# EAGLE board AQ_sensor_GSM (EAGLE 9.6.2)
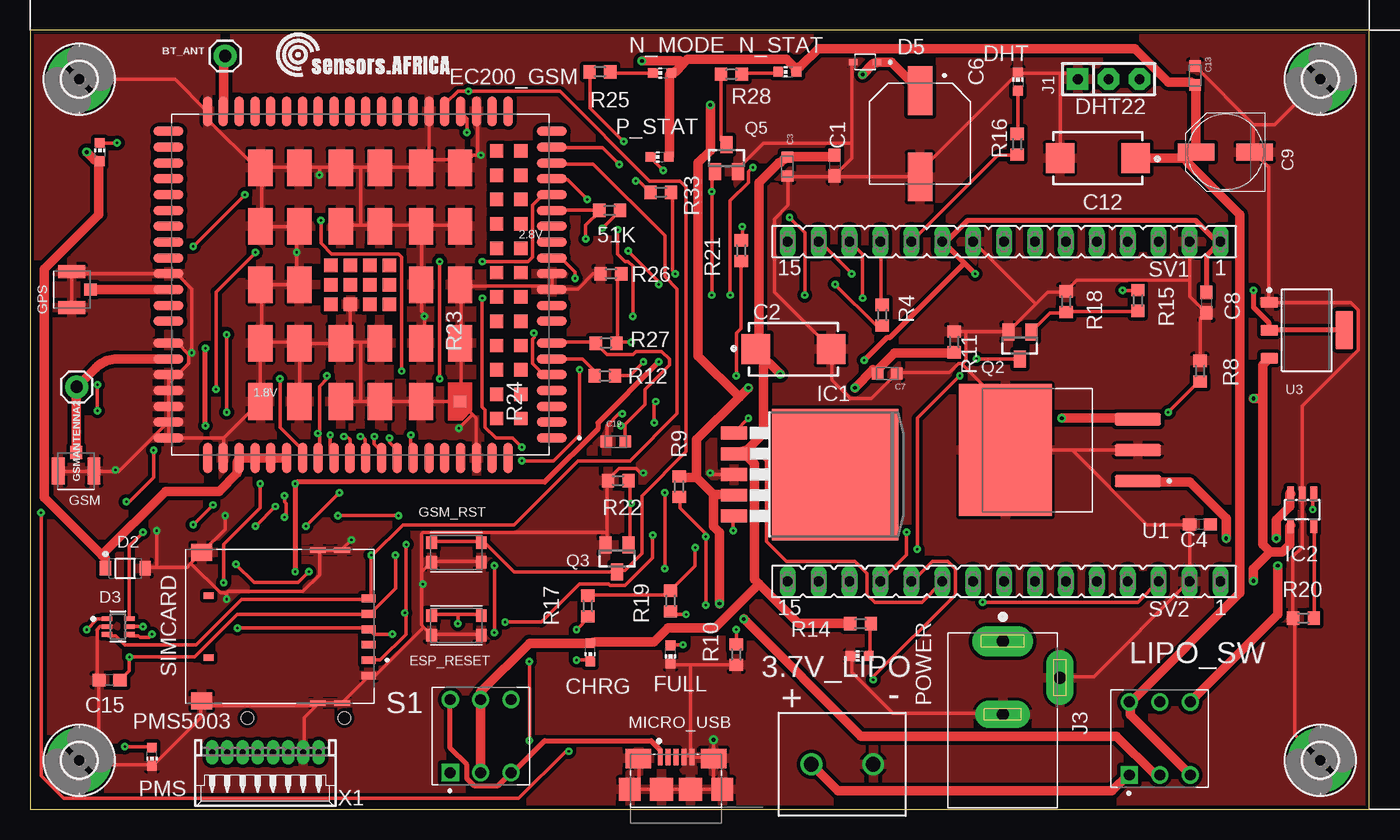
[diagram p0: board, top side]
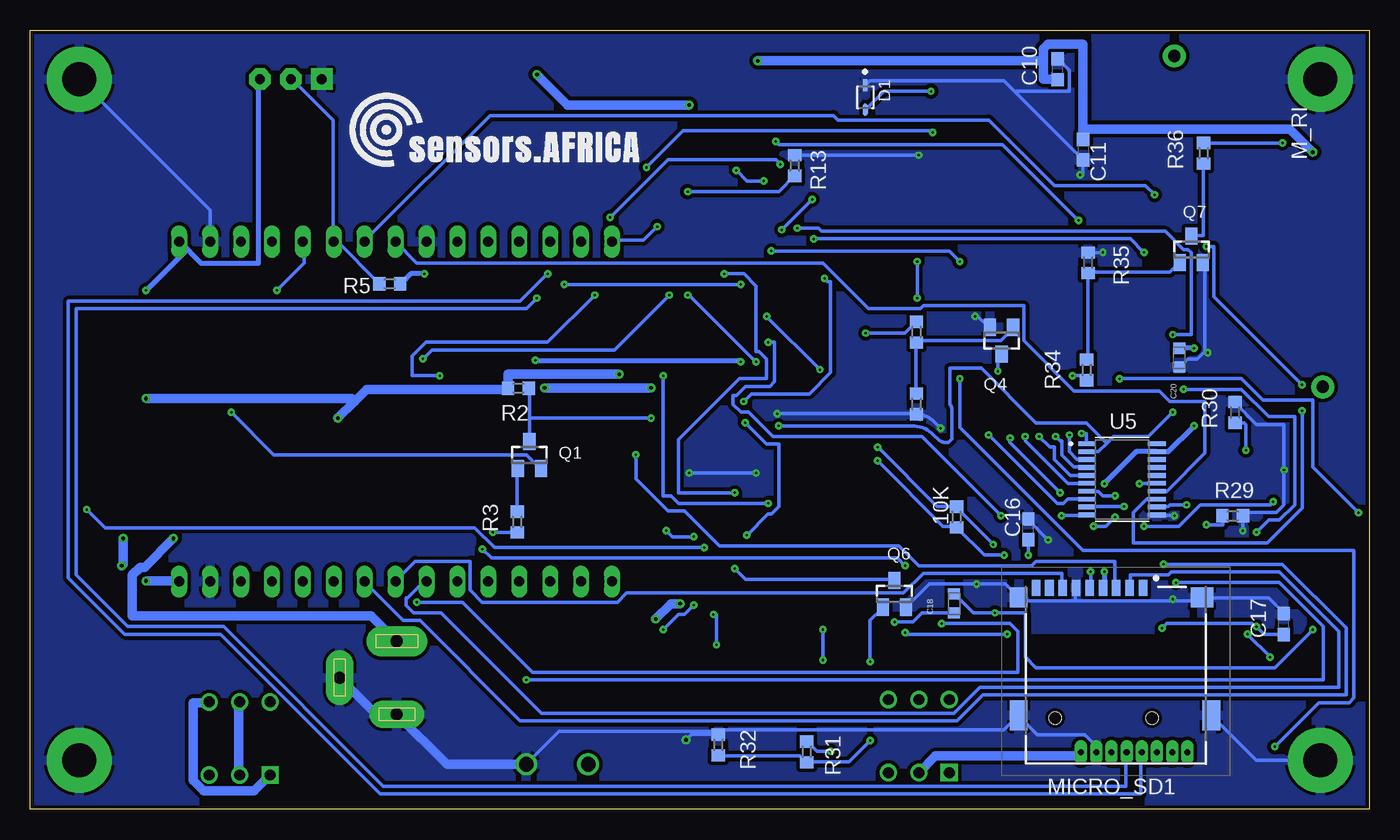
[diagram p1: board, bottom side, seen from below]

Size 110 x 64 mm. Coordinates in mm from the lower left corner, seen from the top.
Outline: 0,0 110,0 110,64 0,64 0,0
Copper layers (1*16): Top 0.035mm / dielectric 1.5mm / Bottom 0.035mm
Design rules "default *": minimum track width 0.1mm, minimum drill 0.15mm, track to track 0.3mm, track to pad 0.1mm, pad to pad 0.2mm, via to via 0.3mm, smd to smd 0.3mm, copper to edge 0.3mm, drill to drill 0.3mm, minimum pad ring 10mil, minimum via ring 8mil, stop-mask expansion 4mil, vias tented up to drill 0mil, thermal gap 10mil
Net classes: 0 default: width 0.3 mm, drill 0.2 mm, clearance 0.2 mm; 1 POWER: width 0.4 mm, drill 0.2 mm, clearance 0.2 mm to class 0, clearance 0.2 mm; 2 BGA: width 0.3 mm, drill 0.2 mm; 3 HCurrent: width 0.8 mm, drill 0.3 mm, clearance 0.2 mm to class 0

## Footprints (pad centres in the part's own frame; a part is rotated, then mirrored left to right if it is on the bottom)
TERMBLK_508-2N = drill 1.2: 1 0,0; 2 5.08,0
R0603 = smd 1 x 1.1: 1 -0.85,0; 2 0.85,0
1X01 = drill 1.016 pad 1.88: 1 0,0
C0603 = smd 1.1 x 1: 1 -0.85,0; 2 0.85,0
CAPMP7343X430N = smd 2.35 x 2.45: 1 -3.1,0; 2 3.1,0
CAPC1608X90N = smd 0.92 x 0.98: 1 -0.775,0; 2 0.775,0
CAP_EEEFN1C471P = smd 4 x 2: 1 -3.55,0; 2 3.55,0
PANASONIC_D = smd 3 x 1.4: + 2.4,0; - -2.4,0
CHIP-LED0603 = smd 0.8 x 0.8: A 0,-0.75; C 0,0.75
ON_SEMI_1N4148WS_0 = smd 1.006 x 0.392: 1 -1,0; 2 1,0
ON_SEMICONDUCTOR_MMSZ5231BT1G_0 = smd 0.91 x 1.22: 1 -1.635,0; 2 1.635,0
SEMTECH_SMF05C_0 = smd 0.85 x 0.4: 1 -0.925,0.65; 2 -0.925,0; 3 -0.925,-0.65; 4 0.925,-0.65; 5 0.925,0; 6 0.925,0.65
DIO_1N4148WS_RR = smd 0.7 x 0.5: A 1,0; C -1,0
XCVR_EC200UCNAB-N05-SNNSA = smd 2.5 x 0.8: 1 -15.75,12.6; 2 -15.75,11.3; 3 -15.75,10; 4 -15.75,8.7; 5 -15.75,7.4; 6 -15.75,6.1; 7 -15.75,4.8; 8 -15.75,0.4; 9 -15.75,-0.9; 10 -15.75,-2.2; 11 -15.75,-3.5; 12 -15.75,-4.8; 13 -15.75,-6.1; 14 -15.75,-7.4; 15 -15.75,-8.7; 16 -15.75,-10; 17 -15.75,-11.3; 18 -15.75,-12.6; 37 15.75,-12.6; 38 15.75,-11.3; 39 15.75,-10; 40 15.75,-8.7; 41 15.75,-7.4; 42 15.75,-6.1; 43 15.75,-4.8; 44 15.75,-3.5; 45 15.75,-2.2; 46 15.75,-0.9; 47 15.75,0.4; 48 15.75,4.8; 49 15.75,6.1; 50 15.75,7.4; 51 15.75,8.7; 52 15.75,10; 53 15.75,11.3; 54 15.75,12.6; 141 -15.75,3; 142 -15.75,1.7; 143 15.75,1.7; 144 15.75,3 | smd 0.8 x 2.5: 19 -9.55,-14.25; 20 -8.25,-14.25; 21 -6.95,-14.25; 22 -5.65,-14.25; 23 -4.35,-14.25; 24 -3.05,-14.25; 25 -1.75,-14.25; 26 -0.45,-14.25; 27 0.85,-14.25; 28 2.15,-14.25; 29 3.45,-14.25; 30 4.75,-14.25; 31 6.05,-14.25; 32 7.35,-14.25; 33 8.65,-14.25; 34 9.95,-14.25; 35 11.25,-14.25; 36 12.55,-14.25; 55 12.55,14.25; 56 11.25,14.25; 57 9.95,14.25; 58 8.65,14.25; 59 7.35,14.25; 60 6.05,14.25; 61 4.75,14.25; 62 3.45,14.25; 63 2.15,14.25; 64 0.85,14.25; 65 -0.45,14.25; 66 -1.75,14.25; 67 -3.05,14.25; 68 -4.35,14.25; 69 -5.65,14.25; 70 -6.95,14.25; 71 -8.25,14.25; 72 -9.55,14.25; 113 -10.85,14.25; 114 -12.15,14.25; 115 -10.85,-14.25; 116 -12.15,-14.25 | smd 1.1 x 1.1: 73 2.4,1.6; 74 2.4,0; 75 2.4,-1.6; 76 0.8,1.6; 77 0.8,0; 78 0.8,-1.6; 79 -0.8,1.6; 80 -0.8,0; 81 -0.8,-1.6; 82 -2.4,1.6; 83 -2.4,0; 84 -2.4,-1.6; 117 -11.2,11; 118 -11.2,9; 119 -11.2,7; 120 -11.2,5; 121 -11.2,3; 122 -11.2,1; 123 -11.2,-1; 124 -11.2,-3; 125 -11.2,-5; 126 -11.2,-7; 127 -11.2,-9; 128 -11.2,-11; 129 -13.2,11; 130 -13.2,9; 131 -13.2,7; 132 -13.2,5; 133 -13.2,3; 134 -13.2,1; 135 -13.2,-1; 136 -13.2,-3; 137 -13.2,-5; 138 -13.2,-7; 139 -13.2,-9; 140 -13.2,-11 | smd 2 x 3: 85 8.2,9.6; 86 8.2,4.8; 87 8.2,0; 88 8.2,-4.8; 89 8.2,-9.6; 90 5,9.6; 91 5,4.8; 92 5,0; 93 5,-4.8; 94 5,-9.6; 95 1.6,9.6; 96 1.6,4.8; 97 1.6,-4.8; 98 1.6,-9.6; 99 -1.6,9.6; 100 -1.6,4.8; 101 -1.6,-4.8; 102 -1.6,-9.6; 103 -5,9.6; 104 -5,4.8; 105 -5,0; 106 -5,-4.8; 107 -5,-9.6; 109 -8.2,4.8; 110 -8.2,0; 111 -8.2,-4.8; 112 -8.2,-9.6 | smd 1 x 1: 108 -8.2,9.6
SW_KMR621NGLFS = smd 0.9 x 1: 1_1 -2.05,0.8; 1_2 2.05,0.8; 2_1 -2.05,-0.8; 2_2 2.05,-0.8
TE_1909763-1 = smd 1 x 1.05: 1 0,-1.525 | smd 1.05 x 2.2: 2 -1.475,0; 3 1.475,0
2,8-PAD = drill 2.8 pad 5.334: B2,8 0,0
TO263-5 = smd 1.067 x 2.159: 1 -3.404,-5.791; 2 -1.702,-5.791; 3 0,-5.791; 4 1.702,-5.791; 5 3.404,-5.791 | smd 10.8 x 10.41: 6 0,2.54
SOT23-5L = smd 0.55 x 1.2: 1 -0.95,-1.3; 2 0,-1.3; 3 0.95,-1.3; 4 0.95,1.3; 5 -0.95,1.3
SIP-100-03-32 = drill 0.813 pad 1.778 square: 1 -2.54,0 | drill 0.813 pad 1.778 octagon: 2 0,0; 3 2.54,0
CUI_PJ-002BH = drill 1 pad 2.5 long: 1 0,0 | drill 1 pad 2.25 long: 2 6,0; 3 3,4.7
SW_TL2285EE = drill 0.9 square: 1 -2.5,-3 | drill 0.9: 2 0,-3; 3 2.5,-3; 4 -2.5,3; 5 0,3; 6 2.5,3
TF-01A = smd 0.7 x 1.3: 1 2.23,7.174; 2 1.13,7.174; 3 0.03,7.174; 4 -1.07,7.174; 5 -2.17,7.174; 6 -3.27,7.174; 7 -4.37,7.174; 8 -5.47,7.174; CD1 -6.57,7.174 | smd 1.448 x 1.651: MP1 -7.989,6.4 | smd 1.448 x 2.438: MP2 -7.989,-3.3; MP3 7.836,-3.3 | smd 1.854 x 1.651: MP4 7.061,6.4 | hole 1: -5.004,-3.531; 2.972,-3.531
AMPHENOL_10118192-0001LF = smd 0.4 x 1.35: 1 -1.3,0; 2 -0.65,0; 3 0,0; 4 0.65,0; 5 1.3,0 | smd 2.1 x 1.6: SH1 -3.1,-0.125; SH2 3.1,-0.125 | smd 1.8 x 1.9: SH3 -3.8,-2.675; SH6 3.8,-2.675 | smd 1.9 x 1.9: SH4 -1.2,-2.675; SH5 1.2,-2.675
SOT23-BEC = smd 1 x 1.4: B -0.95,-1.1; C 0,1.1; E 0.95,-1.1
MOLEX_78646-3001 = smd 1.15 x 0.65: C1 -7.295,2.755; C2 -7.295,0.215; C3 -7.295,-2.325; C5 -7.295,4.025; C6 -7.295,1.485; C7 -7.295,-1.055 | smd 1.3 x 0.45: G1 -5.125,6.27; G2 -3.125,6.27; G3 -5.125,-6.27; G4 -3.125,-6.27 | smd 1.7 x 1.4: G5 6.435,-6.105; G6 6.435,6.105 | smd 0.8 x 0.54: X1 5.855,2.54; X2 5.855,-2.54
FE15 = drill 0.813 long: 1 -17.78,0; 2 -15.24,0; 3 -12.7,0; 4 -10.16,0; 5 -7.62,0; 6 -5.08,0; 7 -2.54,0; 8 0,0; 9 2.54,0; 10 5.08,0; 11 7.62,0; 12 10.16,0; 13 12.7,0; 14 15.24,0; 15 17.78,0
TO254P1524X483-4N = smd 3.79 x 0.99: 1 -6.4,2.54; 2 -6.4,0; 3 -6.4,-2.54 | smd 7.62 x 10.84: 4 4.48,0
TEXAS_INSTRUMENTS_LM1117IMP-3.3-NOPB_0 = smd 1.45 x 0.9: 1 -3.075,2.3; 2 -3.075,0; 3 -3.075,-2.3 | smd 1.45 x 3.15: 4 3.075,0
SOP65P640X120-20N = smd 1.57 x 0.41: 1 -2.87,2.925; 2 -2.87,2.275; 3 -2.87,1.625; 4 -2.87,0.975; 5 -2.87,0.325; 6 -2.87,-0.325; 7 -2.87,-0.975; 8 -2.87,-1.625; 9 -2.87,-2.275; 10 -2.87,-2.925; 11 2.87,-2.925; 12 2.87,-2.275; 13 2.87,-1.625; 14 2.87,-0.975; 15 2.87,-0.325; 16 2.87,0.325; 17 2.87,0.975; 18 2.87,1.625; 19 2.87,2.275; 20 2.87,2.925
53048-08 = drill 0.5 pad 0.698 long: 1 4.375,-1.25; 2 3.125,-1.25; 3 1.875,-1.25; 4 0.625,-1.25; 5 -0.625,-1.25; 6 -1.875,-1.25; 7 -3.125,-1.25; 8 -4.375,-1.25

## Placement (x,y rotation side)
3.7V_LIPO  2828XX-2282837-2  [TERMBLK_508-2N]  69.25,3.68 180 top
10K  4.7K  [R0603]  33.9,24 90 bottom
51K  4.7K  [R0603]  47.6,49.2 0 top
BT_ANT  [1X01]  16,61.9 0 top
C1  10uF  [C0603]  66.08,52.9 270 top
C2  470uf  [CAPMP7343X430N]  62.7,37.8 0 top
C3  100nf  [CAPC1608X90N]  62.2,52.8 90 top
C4  10uF  [C0603]  96.1,23.4 180 top
C6  EEEFN1C471P  [CAP_EEEFN1C471P]  73.1,55.5 270 top
C7  100nf  [CAPC1608X90N]  70.4,35.8 180 top
C8  10uF  [C0603]  96.62,41.63 270 top
C9  100uF  [PANASONIC_D]  98.2,54 180 top
C10  33pF  [C0603]  25.6,60.8 90 bottom
C11  10pF  [C0603]  23.5,54.2 270 bottom
C12  470uf  [CAPMP7343X430N]  87.7,53.5 180 top
C13  100nf  [CAPC1608X90N]  95.7,60.3 270 top
C15  33pF  [C0603]  6.5,10.6 180 top
C16  33pF  [C0603]  28,23 90 bottom
C17  33pF  [C0603]  7,15.2 90 bottom
C18  100nf  [CAPC1608X90N]  34.1,16.9 90 bottom
C19  100nf  [CAPC1608X90N]  48.1,30.2 0 top
C20  100nf  [CAPC1608X90N]  15.6,37.1 90 bottom
CHRG  RED  [CHIP-LED0603]  46,12.9 180 top
D1  ON_SEMI_1N4148WSON_SEMI_1N4148WS_0_0  [ON_SEMI_1N4148WS_0]  41.4,58.5 270 bottom
D2  ON_SEMICONDUCTOR_MMSZ5231BT1GON_SEMICONDUCTOR_MMSZ5231BT1G_0_0  [ON_SEMICONDUCTOR_MMSZ5231BT1G_0]  7.8,19.8 0 top
D3  SEMTECH_SMF05CSEMTECH_SMF05C_0_0  [SEMTECH_SMF05C_0]  7.2,15 0 top
D5  ESD56151W04  [DIO_1N4148WS_RR]  68.6,61.4 180 top
DHT  GREEN  [CHIP-LED0603]  81.14,59.79 0 top
EC200_GSM  EC200UCNAB-N05-SNNSA  [XCVR_EC200UCNAB-N05-SNNSA]  27.1,43.1 180 top
ESP_RESET  KMR621NGLFS  [SW_KMR621NGLFS]  35,15.1 180 top
FULL  YELLOW  [CHIP-LED0603]  52.6,12.7 180 top
GPS  1909763-1  [TE_1909763-1]  3.4,42.7 90 top
GSM  1909763-1  [TE_1909763-1]  3.75,27.78 180 top
GSM_RST  KMR621NGLFS  [SW_KMR621NGLFS]  35,21.1 180 top
GSMANTENNA2  [1X01]  3.8,34.7 0 top
H1  MOUNT-PAD-ROUND2.8  [2,8-PAD]  106,4 0 top
H2  MOUNT-PAD-ROUND2.8  [2,8-PAD]  106,60 0 top
H3  MOUNT-PAD-ROUND2.8  [2,8-PAD]  4,60 0 top
H4  MOUNT-PAD-ROUND2.8  [2,8-PAD]  4,4 0 top
IC1  MIC29302WU  [TO263-5]  63.6,27.5 270 top
IC2  MCP73831/OT  [SOT23-5L]  104.5,24.6 180 top
J1  F-1X03-SIP-100-32  [SIP-100-03-32]  88.6,60 0 top
J3  PJ-002BH  [CUI_PJ-002BH]  79.9,13.8 270 top
LIPO_SW  TL2285EE  [SW_TL2285EE]  92.8,5.8 0 top
M_RI  ORANGE  [CHIP-LED0603]  5.7,54 0 top
MICRO_SD1  TF-01A  [TF-01A]  20.8,11 0 bottom
MICRO_USB  10118192-0001LF  [AMPHENOL_10118192-0001LF]  53.05,4.29 0 top
N_MODE  ORANGE  [CHIP-LED0603]  51.9,60.5 90 top
N_STAT  ORANGE  [CHIP-LED0603]  62.2,60.6 90 top
P_STAT  ORANGE  [CHIP-LED0603]  51.7,53.6 90 top
PMS  ORANGE  [CHIP-LED0603]  9.99,4.3 180 top
POWER  RED  [CHIP-LED0603]  68.14,12.59 90 top
Q1  MMBT2222  [SOT23-BEC]  69,29.1 0 bottom
Q2  MMBT2222  [SOT23-BEC]  81.3,38.1 180 top
Q3  MMBT2222  [SOT23-BEC]  48.2,20.6 180 top
Q4  MMBT2222  [SOT23-BEC]  30.2,38.5 180 bottom
Q5  MMBT2222  [SOT23-BEC]  57.2,53.5 0 top
Q6  MMBT2222  [SOT23-BEC]  39,17.7 0 bottom
Q7  MMBT2222  [SOT23-BEC]  14.6,46 0 bottom
R2  51K  [R0603]  69.9,34.6 180 bottom
R3  4.7K  [R0603]  70,23.6 90 bottom
R4  470  [R0603]  69.99,40.6 90 top
R5  4.7K  [R0603]  80.47,43.16 180 bottom
R8  47K  [R0603]  96.1,36 270 top
R9  100k  [R0603]  53.3,26.5 90 top
R10  47K  [R0603]  58,12.7 90 top
R11  470R  [R0603]  75.9,38.4 270 top
R12  4.7K  [R0603]  47.2,35.6 0 top
R13  47K  [R0603]  47.2,52.9 270 bottom
R14  1K  [R0603]  68.21,15.23 180 top
R15  4.7K  [R0603]  91,41.8 270 top
R16  470  [R0603]  81.09,54.64 270 top
R17  470  [R0603]  45.8,16.7 90 top
R18  47K  [R0603]  85.1,41.7 270 top
R19  470  [R0603]  52.6,17.1 90 top
R20  2K  [R0603]  104.6,15.7 180 top
R21  4.7K  [R0603]  58.4,45.9 270 top
R22  47K  [R0603]  48.3,27 0 top
R23  4.7K  [R0603]  37.2,39.2 270 bottom
R24  47K  [R0603]  37.2,33.3 90 bottom
R25  470R  [R0603]  46.8,60.6 0 top
R26  120K  [R0603]  47.7,44 180 top
R27  10K  [R0603]  47.3,38.3 0 top
R28  470R  [R0603]  57.6,60.4 0 top
R29  51K  [R0603]  11.2,24.1 0 bottom
R30  51K  [R0603]  11,32.6 90 bottom
R31  4.7K  [R0603]  46.2,4.7 270 bottom
R32  47K  [R0603]  53.47,5.28 270 bottom
R33  470R  [R0603]  51.8,50.7 180 top
R34  4.7K  [R0603]  23.2,36.1 90 bottom
R35  47K  [R0603]  23.1,44.9 270 bottom
R36  470R  [R0603]  13.6,53.9 90 bottom
S1  TL2285EE  [SW_TL2285EE]  37,6 0 top
SIMCARD  78646-3001  [MOLEX_78646-3001]  20.5,15 180 top
SV1  [FE15]  80,46.64 180 top
SV2  [FE15]  80,18.7 180 top
U1  LM7805S/NOPB  [TO254P1524X483-4N]  84.6,29.5 180 top
U3  TEXAS_INSTRUMENTS_LM1117IMP-3.3-NOPBTEXAS_INSTRUMENTS_LM1117IMP-3.3-NOPB_0_0  [TEXAS_INSTRUMENTS_LM1117IMP-3.3-NOPB_0]  104.88,39.37 0 top
U5  TXS0108EPWR  [SOP65P640X120-20N]  20.3,27.1 0 bottom
X1  53048-08  [53048-08]  19.3,3.41 180 top

## Library data of the parts
3.7V_LIPO = Connector; CATEGORY: Fixed Terminal Blocks; DESCRIPTION: Fixed Terminal Blocks 5.08MM PCB MOUNT 2P; MANUFACTURER: TE Connectivity AMP Connectors; MPN: 282837-2; OPERATING_TEMPERATURE: -40°C to +105°C; PART_STATUS: ACTIVE; PITCH: 0.200" (5.08mm); ROHS_COMPLIANCE: RoHS Compliant; SERIES: Buchanan; SUBCATEGORY: Terminal Blocks; TYPE: Through Hole; Screw - Rising Cage Clamp; Side wire entry, Horizontal with Board
10K 51K R2-R5 R8-R36 = rcl; SPICEPREFIX: R
BT_ANT GSMANTENNA2 = SparkFun-Connectors
C1 C4 C8-C11 C15-C17 = rcl; SPICEPREFIX: C
C2 C12 = T495X477K010ATE100; AVAILABILITY: In Stock; CHECK_PRICES: https://www.snapeda.com/parts/T495X477K010ATE100/KEMET/view-part/?ref=eda; DESCRIPTION: 470uF Solid MnO2 Tantalum Electrolytic Capacitor, 10 V dc +/-10%, T495 Series | KEMET T495X477K010ATE100; MF: KEMET; MP: T495X477K010ATE100; PACKAGE: SMD-2 Kemet; PRICE: None; PURCHASE-URL: https://www.snapeda.com/api/url_track_click_mouser/?unipart_id=554043&manufacturer=KEMET&part_name=T495X477K010ATE100&search_term= 470uf 10v 100mω ±10% case-e-7343 tantalum capacitors rohs; SNAPEDA_LINK: https://www.snapeda.com/parts/T495X477K010ATE100/KEMET/view-part/?ref=snap
C3 C7 C13 C18-C20 = 06035C104K4T2A; AVAILABILITY: In Stock; CHECK_PRICES: https://www.snapeda.com/parts/06035C104K4T2A/AVX+%252F+Kyocera/view-part/?ref=eda; DESCRIPTION: Capacitor MLCC 0603 100nF 50V | AVX 06035C104K4T2A; MF: AVX; MP: 06035C104K4T2A; PACKAGE: 1608 AVX; PRICE: None; SNAPEDA_LINK: https://www.snapeda.com/parts/06035C104K4T2A/AVX+%252F+Kyocera/view-part/?ref=snap
C6 = EEEFN1C471P; AVAILABILITY: In Stock; CHECK_PRICES: https://www.snapeda.com/parts/EEE-FN1C471P/Panasonic/view-part/?ref=eda; DESCRIPTION: Capacitor,16VDC, 470uF,SMD'Electrolytic | Panasonic Electronic Components EEE-FN1C471P; MF: Panasonic Electronic Components; MP: EEE-FN1C471P; PACKAGE: RADIAL-2 Panasonic; PRICE: None; PURCHASE-URL: https://www.snapeda.com/api/url_track_click_mouser/?unipart_id=6178008&manufacturer=Panasonic Electronic Components&part_name=EEE-FN1C471P&search_term= 470uf 16v ±20% smd; SNAPEDA_LINK: https://www.snapeda.com/parts/EEE-FN1C471P/Panasonic/view-part/?ref=snap
CHRG DHT FULL M_RI N_MODE N_STAT P_STAT PMS POWER = led
D1 = AQ_sensor_GSM; CENTROID_NOT_SPECIFIED: No; DATASHEET: https://www.fairchildsemi.com/datasheets/1N/1N4148WS.pdf; DIGIKEY_DESCRIPTION: DIODE GEN PURP 75V 150MA SOD323F; DIGIKEY_PART_NUMBER: 1N4148WSFSCT-ND; IPC_LAND_PATTERN_NAME: SOD250125X70-2; LEAD_FREE: yes; MF: ON Semi; MFG_PACKAGE_IDENT: CASE 477AB; MOUSER_DESCRIPTION: Diodes - General Purpose, Power, Switching Small Signal Diode; MOUSER_PART_NUMBER: 512-1N4148WS; MPN: 1N4148WS; PACKAGE: SOD-323FL; PREFIX: D; ROHS: yes; TEMPERATURE_RANGE_HIGH: +150°C
D2 = AQ_sensor_GSM; CIIVA_IDS: 804101; COMPONENT_LINK_1_DESCRIPTION: Manufacturer URL; COMPONENT_LINK_1_URL: http://www.onsemi.com/; COMPONENT_LINK_3_DESCRIPTION: Package Specification; COMPONENT_LINK_3_URL: http://www.onsemi.com/pub_link/Collateral/425-04.PDF; DATASHEET: http://www.onsemi.com/pub_link/Collateral/MMSZ5221BT1-D.PDF; DATASHEET_VERSION: Rev. 12; FOOTPRINT_VARIANT_NAME_0: Manufacturer Recommended; IMPORTED: yes; IMPORTED_FROM: vault; IMPORT_TS: 1521844429; MF: On Semiconductor; MOUNTING_TECHNOLOGY: Surface Mount; MPN: MMSZ5231BT1G; PACKAGE: SOD-123-2-425-04; PACKAGE_DESCRIPTION: 2-Pin SOD, Body 1.6 x 2.69 mm; PACKAGE_VERSION: Rev. G, 10/2009; PACKING: Tape and Reel; PREFIX: D; P_MAX_W: 0.5; RELEASE_DATE: 1407150685; ROHS: No; VAULT_GUID: 27F6BF34-1EB2-4973-A1B4-1410F52D084D; VAULT_REVISION: BBBB861B-93F7-43FE-93E6-D586C34E6C45; VZ_TYP_V: 5.1
D3 = AQ_sensor_GSM; CENTROID_NOT_SPECIFIED: No; DATASHEET: http://www.semtech.com/images/datasheet/smf05c.pdf; DIGIKEY_DESCRIPTION: DIODE TVS DIODE 5VWM 12.5VC SC70-6; DIGIKEY_PART_NUMBER: SMF05CCT-ND; JUNCTION_CAPACITANCE: 130pF max; LEAD_FREE: yes; MANUFACTURER_PRODUCT_PAGE: http://www.semtech.com/apps/product.php?pn=SMF05C; MF: Semtech; MFG_PACKAGE_IDENT: SC70-6L; MOUSER_PART_NUMBER: 947-SMF05C.TCT; MPN: SMF05C; PACKAGE: SC-70-6; PREFIX: D; REVERSE_STAND-OFF_VOLTAGE: 5V; ROHS: yes; TEMPERATURE_RANGE_HIGH: +125°C; TEMPERATURE_RANGE_LOW: -55°C
D5 = 4.7V TVS Diode; AVAILABILITY: In Stock; CHECK_PRICES: https://www.snapeda.com/parts/1N4148WS%20RR/Taiwan+Semiconductor/view-part/?ref=eda; DESCRIPTION: 150mA, 100V High Speed SMD Switching Diode; MF: Taiwan Semiconductor; MP: 1N4148WS RR; PACKAGE: SOD-323F Taiwan Semiconductor; PRICE: None; SNAPEDA_LINK: https://www.snapeda.com/parts/1N4148WS%20RR/Taiwan+Semiconductor/view-part/?ref=snap
EC200_GSM = EC200UCNAB-N05-SNNSA; AVAILABILITY: In Stock; CHECK_PRICES: https://www.snapeda.com/parts/EC200UCNAB-N05-SNNSA/Quectel/view-part/?ref=eda; DESCRIPTION: Quectel Wireless Solutions External Passive, 1559-1606, GNSS L1, Spiral, -, SMA Male (center pin), Terminal, 50 oe10; MF: Quectel; MP: EC200UCNAB-N05-SNNSA; PACKAGE: None; PRICE: None; SNAPEDA_LINK: https://www.snapeda.com/parts/EC200UCNAB-N05-SNNSA/Quectel/view-part/?ref=snap
ESP_RESET GSM_RST = AQ_sensor_GSM; AVAILABILITY: Unavailable; DESCRIPTION: Tactile Switch SPST-NO Top Actuated Surface Mount; MF: C&K; MP: KMR621NG LFS; PACKAGE: None; PRICE: None
GPS GSM = 1909763-1; AVAILABILITY: In Stock; CHECK_PRICES: https://www.snapeda.com/parts/1909763-1/TE+Connectivity+AMP+Connectors/view-part/?ref=eda; COMMENT: 1909763-1; DESCRIPTION: U.FL (UMCC) Connector Jack, Male Pin 50 Ohms Surface Mount Solder; MF: TE Connectivity; MP: 1909763-1; PACKAGE: None; PRICE: None; PURCHASE-URL: https://www.snapeda.com/api/url_track_click_mouser/?unipart_id=380488&manufacturer=TE Connectivity&part_name=1909763-1&search_term=1909763; SNAPEDA_LINK: https://www.snapeda.com/parts/1909763-1/TE+Connectivity+AMP+Connectors/view-part/?ref=snap
H1-H4 IC2 J1 = AQ_sensor_GSM
IC1 = MIC29302WU; AVAILABILITY: In Stock; CHECK_PRICES: https://www.snapeda.com/parts/MIC29302WU/Microchip/view-part/?ref=eda; DESCRIPTION: Linear Voltage Regulator IC Positive Adjustable 1 Output 3A TO-263-5; MF: Microchip; MP: MIC29302WU; PACKAGE: TO-263-5 Microchip; PRICE: None; PURCHASE-URL: https://www.snapeda.com/api/url_track_click_mouser/?unipart_id=423468&manufacturer=Microchip&part_name=MIC29302WU&search_term=mic29302wu; SNAPEDA_LINK: https://www.snapeda.com/parts/MIC29302WU/Microchip/view-part/?ref=snap
J3 = PJ-002BH; AVAILABILITY: In Stock; CHECK_PRICES: https://www.snapeda.com/parts/PJ-002BH/CUI+Devices/view-part/?ref=eda; CUI_PURCHASE_URL: https://www.cuidevices.com/product/interconnect/connectors/dc-power-connectors/jacks/pj-002bh?utm_source=snapeda.com&utm_medium=referral&utm_campaign=snapedaBOM; DESCRIPTION: 2.5 x 6.5 mm, 5.0 A, Horizontal, Through Hole, Dc Power Jack Connector; MF: CUI Devices; MP: PJ-002BH; PACKAGE: None; PRICE: None; PURCHASE-URL: https://www.snapeda.com/api/url_track_click_mouser/?unipart_id=329039&manufacturer=CUI Devices&part_name=PJ-002BH&search_term=dc power jack; SNAPEDA_LINK: https://www.snapeda.com/parts/PJ-002BH/CUI+Devices/view-part/?ref=snap
LIPO_SW S1 = TL2285EE; AVAILABILITY: In Stock; CHECK_PRICES: https://www.snapeda.com/parts/TL2285EE/E-Switch/view-part/?ref=eda; DESCRIPTION: Pushbutton Switch DPDT Standard Through Hole; MF: E-Switch; MP: TL2285EE; PACKAGE: None; PRICE: None; PURCHASE-URL: https://www.snapeda.com/api/url_track_click_mouser/?unipart_id=653295&manufacturer=E-Switch&part_name=TL2285EE&search_term= latching straight dpdt switch; SNAPEDA_LINK: https://www.snapeda.com/parts/TL2285EE/E-Switch/view-part/?ref=snap
MICRO_SD1 = TF-01A; AVAILABILITY: Not in stock; CHECK_PRICES: https://www.snapeda.com/parts/TF-01A/HRO+Electronics+Co.%252C+Ltd./view-part/?ref=eda; DESCRIPTION: Standard Card Edge Connectors; MF: HRO Electronics Co., Ltd.; MP: TF-01A; PACKAGE: Package; PRICE: None; SNAPEDA_LINK: https://www.snapeda.com/parts/TF-01A/HRO+Electronics+Co.%252C+Ltd./view-part/?ref=snap
MICRO_USB = AQ_sensor_GSM; AVAILABILITY: Unavailable; DESCRIPTION: USB - micro B USB 2.0 Receptacle Connector 5 Position Surface Mount, Right Angle; MF: Amphenol ICC; MP: 10118192-0001LF; PACKAGE: None; PRICE: None
Q1-Q7 = MMBT2222_; AVAILABILITY: In Stock; CHECK_PRICES: https://www.snapeda.com/parts/MMBT2222/Onsemi/view-part/?ref=eda; DESCRIPTION: Bipolar (BJT) Transistor NPN 30 V 600 mA 250MHz 300 mW Surface Mount SOT-23-3 (TO-236); MF: ON Semiconductor; MP: MMBT2222; PACKAGE: SOT-23-3 Fairchild Semiconductor; PRICE: None; SNAPEDA_LINK: https://www.snapeda.com/parts/MMBT2222/Onsemi/view-part/?ref=snap
SIMCARD = 78646-3001; AVAILABILITY: In Stock; CHECK_PRICES: https://www.snapeda.com/parts/78646-3001/Molex/view-part/?ref=eda; DESCRIPTION: Horizontal Surface Mount Micro SIM Card Connector, with Push In Termination | Molex Incorporated 78646-3001; MF: Molex; MP: 78646-3001; PACKAGE: None; PRICE: None; PURCHASE-URL: https://www.snapeda.com/api/url_track_click_mouser/?unipart_id=75189&manufacturer=Molex&part_name=78646-3001&search_term= 786463001; SNAPEDA_LINK: https://www.snapeda.com/parts/78646-3001/Molex/view-part/?ref=snap
SV1 SV2 = AQ_sensor_GSM; OC_FARNELL: unknown; OC_NEWARK: unknown
U1 = LM7805S_NOPB; AVAILABILITY: In Stock; CHECK_PRICES: https://www.snapeda.com/parts/LM7805S/NOPB/Texas+Instruments/view-part/?ref=eda; DESCRIPTION: 1.5-A, 30-V, linear voltage regulator; MF: Texas Instruments; MP: LM7805S/NOPB; PACKAGE: TO263-3 Texas Instruments; PRICE: None; PURCHASE-URL: https://www.snapeda.com/api/url_track_click_mouser/?unipart_id=546227&manufacturer=Texas Instruments&part_name=LM7805S/NOPB&search_term=lm7805; SNAPEDA_LINK: https://www.snapeda.com/parts/LM7805S/NOPB/Texas+Instruments/view-part/?ref=snap
U3 = AQ_sensor_GSM; CIIVA_IDS: 19361124; CODE__IPC: SOT223-4; CODE__JEDEC: TO-261-AA; COMPONENT_LINK_1_DESCRIPTION: Datasheet URL; COMPONENT_LINK_1_URL: http://www.ti.com/general/docs/lit/getliterature.tsp?genericPartNumber=LM1117-N&fileType=pdf; COMP_TYPE: LDO IC; FOOTPRINT_VARIANT_NAME_0: Level C; FOOTPRINT_VARIANT_NAME_1: Level B; FOOTPRINT_VARIANT_NAME_2: Level A; HIGH__RELIABILITY: Y; IMPORTED: yes; IMPORTED_FROM: vault; IMPORT_TS: 1521845365; MF: Texas Instruments; MPN: LM1117IMP-3.3/NOPB; PACKAGE: DCY0004A; PACKAGE_DESCRIPTION: Molded SOT-223, 6.50 x 3.56 x 1.6mm Body, 4 Lead, 2.3mm Pitch; PACKAGE_TOP_MARKING: XYTT*N05B; PIN_COUNT: 4; POWER_WISE: N; PREFIX: U; RELEASE_DATE: 1464077430; ROHS: Yes; VAULT_GUID: 7E820BF6-F141-44C1-8A74-392CB201F257; VAULT_REVISION: 16019014-2FBF-4157-ADF5-B132B4DC413A
U5 = TXS0108EPWR; AVAILABILITY: In Stock; CHECK_PRICES: https://www.snapeda.com/parts/TXS0108EPWR/Texas+Instruments/view-part/?ref=eda; DESCRIPTION: 8-bit bidirectional voltage-level shifter for open-drain and push-pull application; MF: Texas Instruments; MP: TXS0108EPWR; PACKAGE: TSSOP-20 Texas Instruments; PRICE: None; PURCHASE-URL: https://www.snapeda.com/api/url_track_click_mouser/?unipart_id=105750&manufacturer=Texas Instruments&part_name=TXS0108EPWR&search_term=txs0108epwr; SNAPEDA_LINK: https://www.snapeda.com/parts/TXS0108EPWR/Texas+Instruments/view-part/?ref=snap
X1 = AQ_sensor_GSM; MF: WALDOM/MOLEX; MPN: 53048-0810; OC_FARNELL: 9733094; OC_NEWARK: 38C9913

## Nets
+3V3 [POWER]: C8.1 C20.2 J1.3 MICRO_SD1.4 R5.1 SV1.1 SV1.10 U3.2 U3.4 U5.19
+5V [HCurrent]: C1.1 C2.1 C3.2 CHRG.A IC1.2 IC2.4 R2.2 R14.2 S1.2 S1.5 SV2.1 U1.3 U3.3 X1.8
BP [HCurrent]: 3.7V_LIPO.2 IC2.3 LIPO_SW.1 LIPO_SW.6
BT_ANT [HCurrent]: BT_ANT.1 EC200_GSM.35
CP [HCurrent]: C6.1 C7.2 D5.C IC1.4 LIPO_SW.2 LIPO_SW.5 R9.2 R11.2
D+: MICRO_USB.3
D-: MICRO_USB.2
DHT_LED: R16.2 SV1.11
DHT_OUT: J1.2 R5.2 SV1.6
ESP_RST: ESP_RESET.2_1 ESP_RESET.2_2 SV2.3
GND: 3.7V_LIPO.1 C1.2 C2.2 C3.1 C4.2 C6.2 C7.1 C8.2 C9.- C10.2 C11.2 C12.2 C13.1 C15.2 C16.2 C17.2 C19.1 C20.1 D1.1 D2.2 D3.2 D5.A DHT.C EC200_GSM.8 EC200_GSM.9 EC200_GSM.19 EC200_GSM.22 EC200_GSM.36 EC200_GSM.46 EC200_GSM.48 EC200_GSM.50 EC200_GSM.51 EC200_GSM.52 EC200_GSM.53 EC200_GSM.54 EC200_GSM.56 EC200_GSM.72 EC200_GSM.76 EC200_GSM.85 EC200_GSM.86 EC200_GSM.87 EC200_GSM.88 EC200_GSM.89 EC200_GSM.90 EC200_GSM.91 EC200_GSM.92 EC200_GSM.93 EC200_GSM.94 EC200_GSM.95 EC200_GSM.96 EC200_GSM.97 EC200_GSM.98 EC200_GSM.99 EC200_GSM.100 EC200_GSM.101 EC200_GSM.102 EC200_GSM.103 EC200_GSM.104 EC200_GSM.105 EC200_GSM.106 EC200_GSM.107 EC200_GSM.108 EC200_GSM.109 EC200_GSM.110 EC200_GSM.111 EC200_GSM.112 ESP_RESET.1_1 ESP_RESET.1_2 FULL.C GPS.2 GPS.3 GSM.2 GSM.3 GSM_RST.1_1 GSM_RST.1_2 H1.B2,8 H2.B2,8 H3.B2,8 H4.B2,8 IC1.3 IC2.2 J1.1 J3.2 J3.3 MICRO_SD1.6 MICRO_SD1.MP1 MICRO_SD1.MP2 MICRO_SD1.MP3 MICRO_SD1.MP4 MICRO_USB.4 MICRO_USB.5 MICRO_USB.SH1 MICRO_USB.SH2 MICRO_USB.SH3 MICRO_USB.SH4 MICRO_USB.SH5 MICRO_USB.SH6 PMS.C POWER.C Q2.E Q3.E Q4.E Q5.E Q6.E Q7.E R8.1 R10.1 R11.1 R13.1 R18.1 R20.2 R22.1 R24.1 R26.2 R29.2 R30.2 R32.1 R35.1 SIMCARD.C5 SIMCARD.G1 SIMCARD.G2 SIMCARD.G3 SIMCARD.G4 SIMCARD.G5 SIMCARD.G6 SV1.2 SV1.9 SV2.2 U1.2 U1.4 U3.1 U5.11 X1.7
GNSS_ANT [HCurrent]: EC200_GSM.47 GPS.1
GSM_ANT [HCurrent]: EC200_GSM.49 GSM.1 GSMANTENNA2.1
GSM_RST [BGA]: EC200_GSM.20 Q2.C
GSM_RST_O: R15.1 SV1.5
JACKP [HCurrent]: J3.1 U1.1
MAIN_CTS: EC200_GSM.64 U5.4
MAIN_DCD: EC200_GSM.63 U5.3
MAIN_DTR: EC200_GSM.66 U5.6
MAIN_RI [BGA]: EC200_GSM.62 R34.1 U5.1
MAIN_RTS: EC200_GSM.65 U5.5
MAIN_RXD: EC200_GSM.68 U5.8
MAIN_TXD: EC200_GSM.67 U5.7
MCU_CTS: U5.17
MCU_DCD: U5.18
MCU_DTR: SV2.11 U5.15
MCU_RI: U5.20
MCU_RTS: U5.16
MCU_RXD: SV1.8 U5.14
MCU_TXD: SV1.7 U5.13
N$1: Q2.B R15.2 R18.2
N$2: Q3.B R21.2 R22.2
N$4: PMS.A R4.1
N$5: EC200_GSM.128
N$6: CHRG.C R17.1
N$7: EC200_GSM.139
N$8: EC200_GSM.136
N$9: IC2.1 R17.2 R19.2
N$12: FULL.A R19.1
N$13: IC2.5 R20.1
N$15: EC200_GSM.127
N$16: EC200_GSM.135
N$22: Q5.B R12.2 R13.2
N$23: EC200_GSM.2
N$25: POWER.A R14.1
N$26: Q4.B R23.2 R24.2
N$27: DHT.A R16.1
N$28: Q6.B R31.2 R32.2
N$29: Q4.C R25.1
N$30: N_MODE.C R25.2
N$31: R26.1 R27.2 U5.10
N$32: Q6.C R33.1
N$33: Q5.C R28.1
N$34: N_STAT.C R28.2
N$35: IC1.1 Q1.C R2.1
N$36: Q1.B R3.2
N$37: Q1.E R8.2
N$38: IC1.5 R9.1 R10.2
N$39: P_STAT.C R33.2
N$40: R30.1 U5.9
N$41: R29.1 U5.12
N$42: Q7.B R34.2 R35.2
N$43: Q7.C R36.1
N$44: M_RI.C R36.2
NET_MODE: EC200_GSM.5 R23.1
NETSTAT [BGA]: EC200_GSM.6 R12.1
PMS_LED: R4.2 SV1.12
PMS_RX: SV1.13 X1.5
PMS_TX: SV1.14 X1.4
PWRKEY [BGA]: D1.2 EC200_GSM.21 GSM_RST.2_1 GSM_RST.2_2 Q3.C
PWRKEY_0: R21.1 SV1.15
PWRSTAT: EC200_GSM.61 R31.1
SDIO1_VDD: EC200_GSM.34
SIMCLK [BGA]: C16.1 D3.3 EC200_GSM.16 SIMCARD.C3
SIMDATA: 10K.1 C15.1 D3.4 EC200_GSM.15 SIMCARD.C7
SIMRST: C17.1 D3.5 EC200_GSM.17 SIMCARD.C2
TF-CLK: MICRO_SD1.5 SV2.7
TF-CS: MICRO_SD1.2 SV2.9
TF-MISO: MICRO_SD1.7 SV2.8
TF-MOSI: MICRO_SD1.3 SV2.10
USB_VBUS: EC200_GSM.71
USBP [POWER]: MICRO_USB.1 S1.3 S1.4
USIM_DET: 51K.1 D3.6 EC200_GSM.13
USIM_GND: C18.1 EC200_GSM.10
USIM_VDD: 10K.2 C18.2 D3.1 EC200_GSM.14 SIMCARD.C1
V_LIPO [HCurrent]: C9.+ C10.1 C11.1 C12.1 C13.2 D2.1 EC200_GSM.57 EC200_GSM.58 EC200_GSM.59 EC200_GSM.60 LIPO_SW.3 LIPO_SW.4 M_RI.A N_MODE.A N_STAT.A P_STAT.A
VBAT_EN: R3.1 SV2.12
VDD_EXT: 51K.2 C19.2 EC200_GSM.7 R27.1 U5.2
VPP: SIMCARD.C6
VRTC [BGA]: C4.1

## Tracks (layer width: path | path; a pad name or v marks a point on that pad's centre or on a via)
+3V3  (via drill 0.2)
  Top 0.4: v14.38,31.5 v14.38,37.88 | v21.75,19.5 v21.75,26.75 21.88,26.88 42.25,26.88 46.62,31.25 46.62,31.75 v51.62,36.75 | U3.4 107.88,39.38 101.88,39.38 U3.2 101.75,39.5 101.75,40 100.5,41.25 v100.5,42.62 | 76.75,44.88 75,46.62 SV1.10 75.25,46.62 77,48.38 95.75,48.38 97.5,46.62 SV1.1 97.75,46.62 96.62,45.5 96.62,42.5 C8.1 | 76.75,44.88 v77.62,44 | v68.5,36.88 70.38,38.75 70.62,38.75 76.75,44.88
  Bottom 0.4: v14.38,37.88 C20.2 | v14.38,31.5 16.5,29.38 U5.19 19.12,29.38 v21.75,26.75 | v21.75,19.5 21.75,18.25 MICRO_SD1.4 | v77.62,44 78.75,44 79.5,43.25 R5.1 | J1.3 91.25,60 91.25,44.88 96,44.88 97.75,46.62 SV1.1 97.25,45.88 v100.5,42.62 | v51.62,36.75 51.75,36.88 v68.5,36.88
+5V  (via drill 0.3)
  Top 0.8: S1.2 S1.5 37,9.62 41,13.62 46,13.62 CHRG.A 46.38,13.75 51.25,13.75 52.38,14.88 56.25,14.88 59.88,18.5 | 101.88,21.12 102.88,21.12 103.5,21.75 103.5,23.25 IC2.4 | 101.88,21.12 101.25,21.75 101.25,33.75 | 101.25,33.75 101.25,36.5 101.75,37 U3.3 | v100.5,18.75 100.5,19.75 101.88,21.12 | 59.88,18.5 59.5,18.88 59.5,28.38 58.75,29.12 57.88,29.12 IC1.2 58.88,29.5 60.25,30.88 60.25,36.62 C2.1 | 59.88,18.5 63.12,15.25 67.25,15.25 R14.2 | C1.1 66,53.75 65.88,53.62 62.25,53.62 C3.2 61.88,53.38 61.62,53.12 61.5,53.12 59.88,51.5 59.88,38.12 C2.1 | v61.62,35.75 59.62,37.75 C2.1 | v84.75,32.12 91,32.12 U1.3 | v100.5,33.75 101.25,33.75
  Bottom 0.8: S1.2 35.62,4.38 24,4.38 23.75,4.62 X1.8 | v100.5,18.75 97.88,18.75 SV2.1 | v61.62,35.75 70.75,35.75 R2.2 71.12,34.5 82.38,34.5 83.38,33.5 | 83.38,33.5 v84.75,32.12 | v100.5,33.75 83.62,33.75 83.38,33.5
BP  (via drill 0.3)
  Top 0.8: v102.38,22.25 102.38,23.75 103.5,24.88 103.5,25.95 IC2.3 | v102.5,20 102.5,16 LIPO_SW.6 | LIPO_SW.1 90.25,2.88 88.87,1.5 66.36,1.5 3.7V_LIPO.2
  Bottom 0.8: v102.38,22.25 102.38,20.12 v102.5,20 | LIPO_SW.1 90.38,2.75 91.62,1.5 95.75,1.5 96.62,2.38 96.62,8.75 95.38,8.75 LIPO_SW.6
BT_ANT
  Top 0.8: EC200_GSM.35 15.88,57.38 15.88,61.75 16,61.88 BT_ANT.1
CP  (via drill 0.3)
  Top 0.8: 69.62,61.38 70.75,61.38 73,59.12 C6.1 | 69.62,61.38 D5.C | 54.75,27.25 53.38,27.25 R9.2 | 56.12,25.88 54.75,27.25 | 56.12,25.88 57.75,25.88 IC1.4 | R11.2 75.88,37.5 71,37.5 69.62,36.12 C7.2 69.25,36.12 v67.75,34.62 | 54.75,27.25 54.75,30.38 58.25,33.88 | v59,34.62 58.25,33.88 | v68.38,60.38 69.25,61.25 69.62,61.38 | v55.88,57.88 55.88,54.12 54.88,53.12 54.88,37.25 58.25,33.88 | v58.62,15.62 68.25,6 89.25,6 92.38,2.88 92.75,2.88 LIPO_SW.2 | v56.62,16.88 56.62,22.75 56.12,23.25 56.12,25.88
  Bottom 0.8: LIPO_SW.2 92.88,2.88 92.88,8.75 LIPO_SW.5 | v67.75,34.62 v59,34.62 | v68.38,60.38 65.88,57.88 v55.88,57.88 | v58.62,15.62 57.38,16.88 v56.62,16.88
DHT_LED
  Top 0.3: R16.2 81,53.75 79.5,53.75 72.5,46.75 SV1.11
DHT_OUT
  Bottom 0.3: R5.2 81.38,43.25 84.75,46.62 85,46.62 SV1.6 85.12,46.75 85.12,56.62 88.5,60 J1.2
ESP_RST  (via drill 0.2)
  Top 0.3: 35.12,16 37,16 ESP_RESET.2_1 | 35.12,16 33,16 ESP_RESET.2_2 | v35.12,15.25 35.12,16 | v78.25,17 91,17 SV2.3
  Bottom 0.3: v35.12,15.25 29.5,15.25 28.88,14.62 28.88,11.25 68.75,11.25 74.5,17 v78.25,17
GND  (via drill 0.2, 0.35)
  Top 0.3: v26.38,22.12 25.62,21.38 SIMCARD.G3 25.5,21.25 23.62,21.25 SIMCARD.G4 23.75,21.12 23.75,19.25 22.38,17.88 16.25,17.88 16.12,17.75 | 10.38,19.88 12.88,19.88 13.19,20.19 | 10.38,19.88 9.5,19.88 D2.2 | 13.19,20.19 14,21 SIMCARD.G5 14.12,21.12 16,23 v16,24.12 | 16.12,17.75 15.62,17.75 13.19,20.19 | v16.12,17.25 16.12,17.75 | D3.2 5.75,15 5.5,14.75 5.5,10.75 C15.2 5.62,10.5 5.62,3.75 H4.B2,8 4.38,3.62 9.88,3.62 PMS.C 10.12,3.62 14,7.5 14,8.88 SIMCARD.G6 14.12,8.5 23.38,8.5 23.44,8.44 | 47.38,22.75 47.38,21.88 47.25,21.75 Q3.E | 47.38,22.75 47.38,27 R22.1 47.5,27.12 48.38,28 49.75,28 50.12,27.62 v50.38,27.62 | IC1.3 56,27.5 v55.88,27.62 | ESP_RESET.1_1 37,14.38 33,14.38 ESP_RESET.1_2 32.31,14.94 | GSM_RST.1_1 37,20.38 33,20.38 GSM_RST.1_2 32.88,20.25 32.12,19.5 | 32.31,14.94 32.12,15.12 32.12,18.5 | 32.12,19.5 32.12,18.5 | 23.44,8.44 23.62,8.62 SIMCARD.G2 23.62,8.75 25.5,8.75 SIMCARD.G1 25.62,8.75 27.75,10.88 SIMCARD.C5 27.88,11 28.38,11 32.31,14.94 | 23.44,8.44 22.5,7.5 22.5,4.75 X1.7 | 47.38,22.75 32.25,22.75 32.12,22.62 32.12,19.5 | v32.25,18.5 32.12,18.5 | R26.2 46.25,44 45,42.75 42.88,42.75 EC200_GSM.8 | EC200_GSM.9 42.88,44 42.88,42.88 EC200_GSM.8 | EC200_GSM.8 42.75,43 35.5,43 EC200_GSM.110 35.38,43 35.38,38.38 EC200_GSM.109 35.38,38.25 35.38,33.62 EC200_GSM.108 | v48.62,32.5 48.38,32.5 47.38,31.5 47.38,30.25 C19.1 | 27.12,33.5 EC200_GSM.99 EC200_GSM.103 EC200_GSM.108 | 27.12,33.5 EC200_GSM.95 | 36.33,32.42 35.38,33.38 EC200_GSM.108 | 36.33,32.42 36.62,32.12 36.62,28.88 EC200_GSM.72 | 36.33,32.42 v35.21,31.31 | GPS.2 3.38,41.25 3.38,44.12 GPS.3 3.5,44 EC200_GSM.46 11.38,43.88 12.12,43.88 13.25,42.75 v13.25,37.5 13.12,37.38 13,37.38
  Top 0.3: 15.88,30.5 15.88,28.88 EC200_GSM.56 | 15.88,30.5 18.88,33.5 EC200_GSM.85 18.88,33.62 18.88,38.25 EC200_GSM.86 | 11.38,35.12 11.38,35.62 EC200_GSM.50 | 11.38,35.12 11.38,34.5 EC200_GSM.51 11.38,34.25 11.38,33.25 EC200_GSM.52 11.38,33 11.38,31.88 EC200_GSM.53 | 13,37.38 12.12,38.25 11.38,38.25 EC200_GSM.48 | 13,37.38 13,36.62 11.5,35.12 11.38,35.12 | GSM.3 2.38,27.75 5.12,27.75 GSM.2 5.38,27.75 7,27.75 | EC200_GSM.53 11.38,31.75 11.38,30.5 EC200_GSM.54 15.88,30.5 | 7,27.75 7.25,27.75 11.25,31.75 EC200_GSM.53 | v7,27.88 7,27.75 | EC200_GSM.76 26.25,41.5 26.25,39.12 25.5,38.38 EC200_GSM.96 | 27.12,38.38 25.62,38.38 EC200_GSM.96 | 27.12,38.38 28.62,38.38 EC200_GSM.100 | EC200_GSM.86 19,38.38 22,38.38 EC200_GSM.91 | EC200_GSM.90 22.12,33.5 22.12,38.25 EC200_GSM.91 | EC200_GSM.96 25.38,38.25 22.25,38.25 EC200_GSM.91 | EC200_GSM.86 19,38.5 19,43 EC200_GSM.87 19,43.12 22,43.12 EC200_GSM.92 21.88,43.25 v21.88,45.75 21.88,47.75 22,47.88 EC200_GSM.93 21.88,47.88 19,47.88 EC200_GSM.88 19,48 19,52.62 EC200_GSM.89 | EC200_GSM.104 32.12,38.38 32.38,38.62 v32.38,40.5 32.38,40.62 32.12,40.88 32.12,43 EC200_GSM.105 32.12,43.25 32.12,47.75 EC200_GSM.106 | 27.12,48 28.62,48 EC200_GSM.101 28.75,48 32,48 EC200_GSM.106 | 27.12,48 25.5,48 EC200_GSM.97 | EC200_GSM.106 32.12,48 35.25,48 EC200_GSM.111 | EC200_GSM.89 18.88,52.75 18.5,52.75 14.62,56.62 14.62,57.25 EC200_GSM.36 14.5,57.38 11.88,60 H3.B2,8 | EC200_GSM.89 19,52.75 22,52.75 EC200_GSM.94 22.12,52.75 23.75,52.75 | 27.12,52.75 28.62,52.75 EC200_GSM.102 28.75,52.75 32,52.75 EC200_GSM.107 | 27.12,52.75 25.5,52.75 EC200_GSM.98 25.38,52.75 23.75,52.75
  Top 0.3: EC200_GSM.22 32.75,53.38 32.12,52.75 EC200_GSM.107 | EC200_GSM.19 36.75,57.25 36.75,53.88 v37,53.75 36.38,53.75 35.38,52.75 EC200_GSM.112 35.88,53.38 32.88,53.38 EC200_GSM.107 | 27.12,52.75 27.12,48 | 23.75,52.75 v23.75,52.12 | 27.12,38.38 27.12,33.5 | v10.38,22.88 10.38,19.88 | 54.25,11.88 58,11.88 R10.1 | 54.25,11.88 52.62,11.88 FULL.C | MICRO_USB.4 53.75,4.38 54.25,4.38 MICRO_USB.5 | 56.12,4.25 54.5,4.25 MICRO_USB.5 | 56.12,4.25 MICRO_USB.SH2 | MICRO_USB.SH1 50,4.12 50,1.75 MICRO_USB.SH3 51.75,1.62 MICRO_USB.SH4 52,1.62 MICRO_USB.SH5 54.38,1.62 56.75,1.62 MICRO_USB.SH6 56.12,1.75 56.12,4.12 MICRO_USB.SH2 | 54.25,11.88 54.25,4.5 MICRO_USB.5 | 56.5,4.5 56.25,4.25 MICRO_USB.SH2 | POWER.C 67.5,12.5 67.5,11.25 70.88,7.88 79.88,7.88 J3.2 | 85.75,29.5 U1.4 80.12,29.62 80.12,33 76.62,36.5 76.62,36.62 | 85.75,29.5 U1.2 | 85.75,29.5 85.75,29.38 91.75,23.38 95.12,23.38 C4.2 95.25,18.75 SV2.2 95.12,18.62 87.38,10.88 84.62,10.88 J3.3 | H1.B2,8 103.88,6.12 103.88,15.62 R20.2 103.75,20.75 104.5,21.5 IC2.2 104.5,33.12 109.12,37.75 109.12,41 108.5,41.62 101.88,41.62 U3.1 101.75,41.75 101.75,52.75 100.62,53.88 C9.- 100.5,54 100.5,56.25 | 100.5,56.25 95.75,61 C13.1 | 100.5,56.25 102.25,56.25 H2.B2,8 | 84.62,60.5 85.5,60.5 86,60 J1.1 | 84.62,60.5 81.25,60.5 DHT.C 81.12,60.5 72.75,52.12 C6.2 73,52 66.12,52 C1.2 | 84.62,60.5 84.62,53.5 C12.2 | 67.5,54.75 67.5,53.5 66.12,52.12 C1.2 | 67.5,54.75 67.5,61.38 D5.A | C1.2 66,52 62.25,52 C3.1 62.25,51.88 62.25,49.62 61.12,48.5 61.12,42.5 65.75,37.88 C2.2 65.88,37.75 65.88,35.25 67.38,33.75 69.12,33.75 C7.1 71.25,35.88 75.5,35.88 76.25,36.62 76.62,36.62
  Top 0.3: 67.5,54.75 60.25,54.75 58.25,52.75 58.25,52.5 Q5.E | R8.1 96.12,36.88 96.12,40.38 96.5,40.75 C8.2 96.5,40.88 95.25,42.12 95.25,43.5 | 95.25,43.5 95.25,46.62 SV1.2 | 76.88,39.25 80.25,39.25 Q2.E 80.38,39.25 82.62,41.5 | 76.88,39.25 R11.1 | 82.62,41.5 83.62,42.5 85,42.5 R18.1 85.12,42.62 86,43.5 95.25,43.5 | 82.62,41.5 77.5,46.62 SV1.9 | 76.62,36.62 76.88,36.88 76.88,39.25 | v56.13,5.69 56.13,4.26 56.12,4.25
  Bottom 0.3: v26.38,22.12 28,23.75 C16.2 | v16,24.12 17.38,24.12 U5.11 | C17.2 7,16.12 8.25,17.38 13.62,17.38 MICRO_SD1.MP4 13.88,17.38 14.12,17.12 16.12,17.12 | 24.12,17.12 24.12,18.12 MICRO_SD1.6 | 24.12,17.12 28.5,17.12 28.75,17.38 MICRO_SD1.MP1 28.88,17.5 29.88,18.5 v32.25,18.5 36.12,18.5 38,16.62 Q6.E | 24.12,17.12 16.12,17.12 | v16.12,17.25 16.12,17.12 | H4.B2,8 9.25,4 12.88,7.62 MICRO_SD1.MP3 | v50.38,27.62 v55.88,27.62 | X1.7 22.5,4.75 22.5,5.25 23.38,6.12 27.25,6.12 28.75,7.62 MICRO_SD1.MP2 28.88,7.62 30,6.5 53.12,6.5 53.38,6.25 R32.1 | v48.62,32.5 37.25,32.5 R24.1 arc45 35.76,31.85 v35.21,31.31 | R30.2 11,33.38 9.25,31.62 7,31.62 v7,27.88 7,25 7.62,24.38 10,24.38 10.25,24.12 R29.2 10.38,24 v10.38,22.88 | 13.5,37.62 14.12,37 14.88,37 15.5,36.38 C20.1 | 13.5,37.62 13.5,44.88 13.62,44.88 Q7.E | v13.25,37.5 13.38,37.62 13.5,37.62 | v21.88,45.75 R35.1 | 29.06,58.94 23.5,53.38 C11.2 23.5,52.12 v23.75,52.12 | 29.06,58.94 30,59.88 41,59.88 41.38,59.5 D1.1 | C10.2 25.5,61.62 24.62,60.75 24.62,59 29,59 29.06,58.94 | v32.38,40.5 32.12,40.5 31.25,39.62 Q4.E | v37,53.75 R13.1 | R32.1 53.5,6.12 53.75,6.38 66.56,6.38 3.7V_LIPO.1 | H2.B2,8 95.25,49.25 95.25,46.75 SV1.2 | R32.1 55.7,6.13 v56.13,5.69
  Bottom 0.8: 3.7V_LIPO.1 75.78,3.68 J3.2 81.6,7.8 J3.3
  pour Top: 0,0 110,0 110,63.7 0,63.7
  pour Bottom: 0,0 110,0 110,63.6 0,63.6
GNSS_ANT
  Top 0.8: GPS.1 EC200_GSM.47
GSM_ANT
  Top 0.8: GSM.1 3.75,34.59 arc-45 GSMANTENNA2.1 5.36,36.26 arc-45 7.15,37 EC200_GSM.49
GSM_RST  (via drill 0.2)
  Top 0.3: v77.75,37 Q2.C | v57.5,42.25 57.5,50 59,51.5 59,52.38 v59.38,52.75 | v35.88,55.62 35.88,56.75 35.38,57.25 EC200_GSM.20
  Bottom 0.3: v77.75,37 77,37.75 62,37.75 v57.5,42.25 | v59.38,52.75 56.38,55.75 36,55.75 v35.88,55.62
GSM_RST_O  (via drill 0.2)
  Top 0.3: v89.75,42.62 91,42.62 R15.1
  Bottom 0.3: v89.75,42.62 87.5,44.88 87.5,46.62 SV1.5
JACKP  (via drill 0.3)
  Top 0.8: v98.25,22.25 98.25,23.88 95.25,26.88 91,26.88 U1.1
  Bottom 0.8: v98.25,22.25 100.62,19.88 101,19.88 101.62,19.25 101.62,15.88 82,15.88 80,13.88 J3.1
MAIN_CTS  (via drill 0.2)
  Top 0.3: v25.75,30.62 26,30.62 26.25,30.38 EC200_GSM.64
  Bottom 0.3: v25.75,30.62 25.38,30.25 25.25,30.25 25.25,29.12 24.25,28.12 23.27,28.12 23.2,28.05 U5.4
MAIN_DCD  (via drill 0.2)
  Top 0.3: v24.62,30.75 24.62,29.12 24.88,28.88 EC200_GSM.63
  Bottom 0.3: v24.62,30.75 24.62,29.38 24,28.75 23.25,28.75 U5.3
MAIN_DTR  (via drill 0.2)
  Top 0.3: v28.25,30.62 28.25,30 28.75,29.5 28.75,28.88 EC200_GSM.66
  Bottom 0.3: v28.25,30.62 28.25,30.25 24.75,26.75 23.25,26.75 U5.6
MAIN_RI  (via drill 0.2)
  Top 0.3: v24.38,35.62 24.38,35.38 23.75,34.75 23.75,30.88 | 23.75,30.88 23.75,28.88 EC200_GSM.62 | v23.62,30.88 23.75,30.88
  Bottom 0.3: v24.38,35.62 23.62,35.62 23.25,35.25 R34.1 | v23.62,30.88 23.25,30.88 23.25,30.12 U5.1
MAIN_RTS  (via drill 0.2)
  Top 0.3: v27.12,30.62 27.25,30.62 27.5,30.38 27.5,28.88 EC200_GSM.65
  Bottom 0.3: v27.12,30.62 26.25,29.75 25.88,29.75 25.88,28.75 24.55,27.43 U5.5
MAIN_RXD  (via drill 0.2)
  Top 0.3: v31.25,30.75 31.25,29 31.38,28.88 EC200_GSM.68
  Bottom 0.3: v31.25,30.75 25.62,25.12 25.12,25.12 24.75,25.5 23.25,25.5 U5.8
MAIN_TXD  (via drill 0.2)
  Top 0.3: v20.88,25.75 20.88,25.25 21,25.12 21,24.12 v20.88,24 | v25.38,26 v22.62,23.25 | v29.5,30.5 29.5,30.12 30.12,29.5 30.12,28.88 EC200_GSM.67
  Bottom 0.3: U5.7 22.25,26.12 21.88,25.75 v20.88,25.75 | v20.88,24 21.62,23.25 v22.62,23.25 | v25.38,26 29.5,30.12 v29.5,30.5
MCU_DTR  (via drill 0.2)
  Top 0.3: v18.88,26.75 18.88,24.75 15.88,21.75 v15.88,18.62 | v69.25,10.62 69.25,10.88 76,17.62 76,19.75 75.38,20.38 74.12,20.38 72.5,18.75 SV2.11
  Bottom 0.3: v18.88,26.75 17.5,26.75 U5.15 | v15.88,18.62 7.38,18.62 3.75,15 3.75,10.62 v69.25,10.62
MCU_RXD
  Bottom 0.3: U5.14 16.62,26.12 13.5,29.25 13.5,33.5 16.38,33.5 17.25,34.38 24.25,34.38 28.38,38.5 28.38,41.38 36.62,41.38 36.88,41.12 41.12,41.12 44.88,44.88 78.25,44.88 80,46.62 SV1.8
MCU_TXD  (via drill 0.2)
  Top 0.3: v5.5,34.88 v5.5,32.75 | v17.62,50.5 v13.38,46.25
  Bottom 0.3: v5.5,32.75 5.5,24.75 8.38,21.88 19.38,21.88 19.38,24.38 18.25,25.5 17.5,25.5 U5.13 | v5.5,34.88 12.75,42.12 12.75,46.25 v13.38,46.25 | v17.62,50.5 18.38,51.25 25.88,51.25 31.25,56.62 43.62,56.62 44,57 72.25,57 82.5,46.75 SV1.7
N$1
  Top 0.3: Q2.B 82.25,39.25 83.75,40.75 85,40.75 R18.2 85.12,40.88 91,40.88 R15.2
N$2  (via drill 0.2)
  Top 0.3: 49.25,25.12 49.25,21.75 Q3.B | 49.25,25.12 49.25,27 R22.2 | v58,35.62 58,39.12 58.38,39.5 58.38,45 R21.2 | v49.38,25.12 49.25,25.12
  Bottom 0.3: v58,35.62 58,25.75 57.38,25.75 56.75,25.12 v49.38,25.12
N$4  (via drill 0.2)
  Top 0.3: v7.75,5.12 9.88,5.12 PMS.A | v33.62,45 v33.62,35.38 | v49.12,45.88 51.62,43.38 v51.62,43.12 | v66.12,43.12 69.5,39.75 R4.1
  Bottom 0.3: v7.75,5.12 4.12,8.75 1.62,8.75 1.25,9.12 1.25,21.25 23.5,21.25 33.62,31.38 v33.62,35.38 | v33.62,45 34.5,45.88 v49.12,45.88 | v66.12,43.12 v51.62,43.12
N$6  (via drill 0.2)
  Top 0.3: v44.88,12.25 46,12.25 CHRG.C | v44.88,14.75 45.88,15.75 R17.1
  Bottom 0.3: v44.88,14.75 v44.88,12.25
N$9  (via drill 0.2)
  Top 0.3: R17.2 45.88,17.62 52.25,17.62 52.5,17.88 R19.2 52.62,18 54.62,20 v54.62,21.5 | v105.38,24.62 105.38,25.88 IC2.1
  Bottom 0.3: v105.38,24.62 103.88,23.12 73.5,23.12 71.88,21.5 v54.62,21.5
N$12  (via drill 0.2)
  Top 0.3: v53.62,13.5 52.62,13.5 FULL.A | v53.88,16 52.88,16 52.62,16.25 R19.1
  Bottom 0.3: v53.62,13.5 53.62,16 v53.88,16
N$13
  Top 0.3: R20.1 105.5,15.75 105.5,23.25 IC2.5
N$22  (via drill 0.2)
  Top 0.3: v50.38,36.75 49.25,35.62 48.12,35.62 R12.2 | v56,42.25 v56,50.75 56,52.12 56.25,52.38 Q5.B
  Bottom 0.3: v50.38,36.75 55.88,42.25 v56,42.25 | R13.2 48.5,50.75 v56,50.75
N$25
  Top 0.3: POWER.A 69,12.62 69,15.12 R14.1
N$26
  Bottom 0.3: R24.2 37.25,34.25 37.25,38.25 R23.2 37.12,38.38 37,38.5 30.25,38.5 29.25,39.5 Q4.B
N$27
  Top 0.3: DHT.A 81.12,59 81.12,55.5 R16.1
N$28  (via drill 0.2)
  Top 0.3: v41,5.62 v41,12.12
  Bottom 0.3: R32.2 53.38,4.38 46.75,4.38 46.25,3.88 R31.2 46.12,3.88 42.75,3.88 v41,5.62 | v41,12.12 41,15.5 40,16.5 Q6.B
N$29  (via drill 0.2)
  Top 0.3: v48.75,54.88 46,57.62 46,60.5 R25.1 | v23.88,48.38 23.88,46.5 24.75,45.62 30.25,45.62 30.5,45.38 v30.5,36
  Bottom 0.3: v48.75,54.88 48.5,54.62 30.12,54.62 v23.88,48.38 | v30.5,36 30.5,37.38 30.25,37.38 Q4.C
N$30
  Top 0.3: N_MODE.C 47.75,60.5 R25.2
N$31  (via drill 0.2)
  Top 0.3: R26.1 48.5,44 48.25,43.75 48.25,38.38 R27.2 48.38,38.38 v49.38,38.38 | v30.25,24.12 v25.25,24.12
  Bottom 0.3: v25.25,24.12 23.25,24.12 U5.10 | v30.25,24.12 36.75,30.62 49,30.62 51,32.62 51.62,32.62 52.25,33.25 52.25,34 52,34 51.25,34.75 49.25,34.75 48.88,35.12 48.88,38.38 v49.38,38.38
N$32  (via drill 0.2)
  Top 0.3: v53,44 52.75,44.25 52.75,50.62 R33.1 | v52.12,19.75 v52.12,26
  Bottom 0.3: v53,44 51.38,44 50.38,43 50.38,37.62 50.12,37.62 49.5,37 49.5,35.38 51.75,35.38 56.75,30.38 56.75,26 v52.12,26 | v52.12,19.75 51.25,18.88 39,18.88 Q6.C
N$33
  Top 0.3: R28.1 56.75,55 57.12,54.62 Q5.C
N$34
  Top 0.3: N_STAT.C 61.38,60.5 58.5,60.5 R28.2
N$35  (via drill 0.2)
  Top 0.3: v59,32.12 57.88,31 IC1.1
  Bottom 0.3: Q1.C 69,32.12 | 69,32.12 69,34.5 R2.1 | 69,32.12 v59,32.12
N$36
  Bottom 0.3: R3.2 70,28 Q1.B
N$37  (via drill 0.2)
  Top 0.3: v93.5,32.62 96,35.12 R8.2
  Bottom 0.3: v93.5,32.62 90,29.12 69.25,29.12 68.12,28 Q1.E
N$38  (via drill 0.2)
  Top 0.3: v58,14.75 R10.2 | v55.5,16.75 v55.5,22.38 55.5,22.62 53.38,24.75 53.38,25.62 R9.1 | v57.75,22.88 57.75,24 IC1.5
  Bottom 0.3: v58,14.75 56.75,16 56.25,16 v55.5,16.75 | v57.75,22.88 57.25,22.38 v55.5,22.38
N$39  (via drill 0.2)
  Top 0.3: v52,52.5 51,53.5 P_STAT.C | v49.75,51.62 50,51.62 50.88,50.75 R33.2
  Bottom 0.3: v52,52.5 51.12,51.62 v49.75,51.62
N$40  (via drill 0.2)
  Top 0.3: v10.12,29.5 10.12,27.25 8.12,25.25 v7.88,25.25 | v20.12,24.88 v18.5,23.25
  Bottom 0.3: R30.1 10.25,31.75 10.12,31.62 v10.12,29.5 | v7.88,25.25 8.12,25 13.88,25 15.62,23.25 v18.5,23.25 | v20.12,24.88 23.13,24.88 U5.9
N$41  (via drill 0.2)
  Top 0.3: v15,25 v13.38,23.38
  Bottom 0.3: v13.38,23.38 12,23.38 12,24 R29.1 | v15,25 16.38,25 16.5,24.88 17.38,24.88 U5.12
N$42
  Bottom 0.3: R34.2 23.12,37 23.12,44 R35.2 23,44.12 16.38,44.12 15.62,44.88 Q7.B
N$43
  Bottom 0.3: R36.1 13.62,53 13.62,47.12 14.5,47.12 Q7.C
N$44  (via drill 0.2)
  Top 0.3: v7.12,54.75 M_RI.C
  Bottom 0.3: R36.2 v7.12,54.75
NET_MODE  (via drill 0.2)
  Top 0.3: v41.38,39.12 41.38,38.75 41.25,38.62 41.25,36.62 42.12,35.75 42.75,35.75 EC200_GSM.5
  Bottom 0.3: R23.1 38.12,39.12 v41.38,39.12
NETSTAT
  Top 0.3: EC200_GSM.6 45.38,37 46.25,36.12 46.25,35.62 R12.1
PMS_LED
  Top 0.3: R4.2 69.88,41.5 69.88,46.62 SV1.12
PMS_RX  (via drill 0.2)
  Top 0.3: v68.38,42 68.38,45.62 67.38,46.62 SV1.13
  Bottom 0.3: v68.38,42 69.25,41.12 106.25,41.12 106.25,19.25 102,15 94.12,15 81,1.88 20,1.88 20,4.62 X1.5
PMS_TX  (via drill 0.2)
  Top 0.3: v67.5,44 64.88,46.62 SV1.14
  Bottom 0.3: v67.5,44 69.75,41.75 106.88,41.75 106.88,19 102.25,14.38 94.38,14.38 81.25,1.25 18.75,1.25 18.75,4.62 X1.4
PWRKEY  (via drill 0.2)
  Top 0.3: EC200_GSM.21 34.12,57.38 34.12,58 35.12,59 v36,59 43.5,59 50.88,51.62 53.38,51.62 53.88,51.12 53.88,29.38 50.25,25.75 50.25,21 48.88,19.62 48.25,19.62 Q3.C 39.75,19.5 37.38,21.88 37.12,21.88 GSM_RST.2_1 37,22 33,22 GSM_RST.2_2
  Bottom 0.3: v36,59 39.88,59 41.38,57.5 D1.2
PWRKEY_0  (via drill 0.2)
  Top 0.3: v58.5,47.88 58.5,46.75 R21.1
  Bottom 0.3: v58.5,47.88 59.62,46.75 62.12,46.75 SV1.15
PWRSTAT  (via drill 0.2)
  Top 0.3: v44.25,4.75 44,4.75 40.12,0.88 2.75,0.88 0.88,2.75 v0.88,24.38 | v20.5,35.38 20.5,31.38 22.25,29.62 22.25,28.88 EC200_GSM.61
  Bottom 0.3: v44.25,4.75 45.38,4.75 46.12,5.5 R31.1 | v0.88,24.38 4.62,28.12 4.62,33.62 8.75,33.62 10.5,35.38 v20.5,35.38
SIMCLK  (via drill 0.2)
  Top 0.3: D3.3 6.38,14.25 7,14.25 7.75,13.5 13.62,13.5 17.38,17.25 27.75,17.25 SIMCARD.C3 27.88,17.38 28,17.5 v28,20.88 28.12,20.88 30.62,23.38 39.75,23.38 45,28.62 49.25,28.62 53.12,32.5 53.12,42.75 52.12,43.75 52.12,47.12 46.25,53 42.88,53 EC200_GSM.16
  Bottom 0.3: v28,20.88 C16.1
SIMDATA  (via drill 0.2)
  Top 0.3: v10,14.38 9.75,14.12 9,14.12 8.88,14.25 8.12,14.25 D3.4 | C15.1 8.12,11.38 v8.12,12.5 13.5,12.5 17,16 27.75,16 SIMCARD.C7 27.88,16 30,18.12 v30,20.88 | v45.75,50.12 44.12,51.75 42.88,51.75 EC200_GSM.15 | v48.25,47.62 48.25,45.62 48.88,45 49.12,45 49.5,44.62 v49.5,40.5 | v45.12,36.12 45.12,30.75 43,28.62 v40.38,28.62
  Bottom 0.3: v8.12,12.5 v10,14.38 | v30,20.88 31.62,20.88 10K.1 34,23.25 35,23.25 v40.38,28.62 | v48.25,47.62 v45.75,50.12 | v45.12,36.12 v49.5,40.5
SIMRST  (via drill 0.2)
  Top 0.3: v9.25,15 D3.5 | v17,14.88 27.75,14.88 SIMCARD.C2 27.88,14.75 28.25,14.38 v29.75,14.38 | v48.38,53 47,54.38 42.88,54.38 EC200_GSM.17 | v62.38,48.62 63.62,47.38 v63.62,42.25 | v76.38,35.62 72.88,32.12 v72.88,21.38 | v38.12,14.5 v38.12,20
  Bottom 0.3: C17.1 7,14.38 8.62,14.38 v9.25,15 9.38,15 9.62,15.25 16.62,15.25 v17,14.88 | v48.38,53 48.75,53.38 57.62,53.38 v62.38,48.62 | v63.62,42.25 67.5,38.38 77.5,38.38 78.62,37.25 78.62,35.62 v76.38,35.62 | v72.88,21.38 72.12,20.62 38.75,20.62 v38.12,20 | v38.12,14.5 38,14.38 v29.75,14.38
TF-CLK  (via drill 0.2)
  Top 0.3: v22.88,19.5 22,18.62 18.38,18.62 v16.88,20.12
  Bottom 0.3: v22.88,19.5 22.88,18.25 MICRO_SD1.5 | v16.88,20.12 7.12,20.12 1.88,14.88 1.88,9.38 31.75,9.38 33.88,7.25 69.75,7.25 78,15.5 79.38,15.5 82.5,18.62 SV2.7
TF-CS
  Bottom 0.3: MICRO_SD1.2 19.62,18.25 19.62,19.25 16.5,19.25 16.25,19.5 7.38,19.5 2.5,14.62 2.5,10 32,10 34.12,7.88 68,7.88 76.25,16.12 78.5,16.12 79.12,16.75 79.12,17.38 79,17.38 77.75,18.62 77.5,18.62 SV2.9
TF-MISO
  Bottom 0.3: MICRO_SD1.7 25.25,18.25 25.25,19.38 36.62,19.38 38.25,17.75 61,17.75 61.75,17 72.88,17 73.88,18 73.88,20.38 78.38,20.38 80,18.75 SV2.8
TF-MOSI  (via drill 0.2)
  Top 0.3: v60.25,29.12 60.25,28.88 60.5,28.62 60.5,22 62.12,20.38 67.75,20.38 68.75,19.38 68.75,17.62 69.38,17 73.25,17 74.88,18.62 SV2.10
  Bottom 0.3: v60.25,29.12 60.25,27.12 57.62,24.5 56.25,24.5 53.38,21.62 38.62,21.62 37,20 27.75,20 27.38,20.38 20.88,20.38 20.88,18.25 MICRO_SD1.3
USBP
  Top 0.4: MICRO_USB.1 51.75,4.88 51,5.62 42.25,5.62 39.62,3 S1.3 38.38,1.88 36.5,1.88 35.88,2.5 35.88,3.62 34.5,5 S1.4
USIM_DET  (via drill 0.2)
  Top 0.3: D3.6 8.12,21.62 v9.25,22.75 | v15.25,34.5 15.25,42.5 v18.5,45.75 | v45.62,46.88 45.62,48 46.75,49.12 51K.1 46.62,49.25 42.88,49.25 EC200_GSM.13
  Bottom 0.3: v9.25,22.75 8.25,23.75 7.38,23.75 6.12,25 6.12,32.25 8.25,32.25 10.5,34.5 v15.25,34.5 | v18.5,45.75 19.62,46.88 v45.62,46.88
USIM_GND  (via drill 0.2)
  Top 0.3: v39,15.38 42,15.38 45.12,18.5 47.5,18.5 47.62,18.38 48.88,18.38 51.12,20.62 v51.12,22.5 | v51.25,31.75 51.25,33.38 v51.38,33.5 | v44.75,43.62 44.75,44.12 43.62,45.25 42.88,45.25 EC200_GSM.10
  Bottom 0.3: C18.1 36.75,16.12 37.5,15.38 v39,15.38 | v51.12,22.5 49.38,24.25 49.12,24.25 48.5,24.88 48.5,30 49.5,30 v51.25,31.75 | v51.38,33.5 50.75,34.12 46,34.12 44.25,35.88 44.25,43.38 44.5,43.38 v44.75,43.62
USIM_VDD  (via drill 0.2)
  Top 0.3: v4.62,14.75 5.5,15.62 6.25,15.62 D3.1 | 30.88,16.12 30.88,14.38 28.75,12.25 27.88,12.25 SIMCARD.C1 | 30.88,16.12 v30.88,21.75 | EC200_GSM.14 42.12,50.5 41.25,49.62 41.25,45.38 40.88,45 v37.12,45 | v37.12,42 37.12,33.03 37.38,32.78 37.38,31.38 38.25,30.5 39.62,30.5 v40.38,29.75 | v30.75,16.12 30.88,16.12
  Bottom 0.3: v4.62,14.75 7.75,11.62 27.38,11.62 28.25,12.5 28.25,16.12 v30.75,16.12 32.5,16.12 34,17.62 C18.2 | v30.88,21.75 33.88,24.75 10K.2 34,24.88 35.5,24.88 v40.38,29.75 | v37.12,42 v37.12,45
V_LIPO  (via drill 0.3)
  Top 0.8: EC200_GSM.60 21,28.88 20.12,28.88 EC200_GSM.59 19.75,28.88 18.88,28.88 EC200_GSM.58 18.38,28.88 17.25,28.88 EC200_GSM.57 17,28.5 17,27.62 15.5,26.12 11.12,26.12 5.88,20.88 | 5.62,53.25 5.62,48.88 1.12,44.38 1.12,25.62 5.88,20.88 | 5.88,20.88 6.12,20.62 6.12,19.88 D2.1 | 5.62,53.25 M_RI.A | v4.62,54 5.25,53.38 5.62,53.25 | LIPO_SW.3 95.25,2.88 90.38,7.75 90.38,8.75 LIPO_SW.4 90.62,9 99.38,17.75 99.38,48.88 95.12,53.12 95,53.5 | 95,53.5 C12.1 | 95,53.5 95.38,53.88 C9.+ 95.75,54 95.75,59.5 C13.2 95.38,59.75 93.5,59.75 90.75,62.5 64.75,62.5 63.25,61 62.88,60.88 | P_STAT.A 52.5,53.62 52.5,60.38 52.62,60.5 N_MODE.A 53,60.62 53.62,61.25 | 62.88,60.88 62.88,60.62 N_STAT.A | 62.88,60.88 62.12,61.62 54,61.62 53.62,61.25 | v50.25,61.5 53.38,61.5 53.62,61.25
  Bottom 0.8: 23.5,55.88 23.5,62.88 26.38,62.88 26.75,62.5 26.75,61.5 | 23.5,55.88 C11.1 | 26.75,61.5 26.75,60 25.62,60 C10.1 | 23.5,55.88 6.5,55.88 v4.62,54 | v50.25,61.5 26.75,61.5
VBAT_EN  (via drill 0.2)
  Top 0.3: v72,22.75 72,20.88 69.88,18.75 SV2.12
  Bottom 0.3: v72,22.75 R3.1
VDD_EXT  (via drill 0.2)
  Top 0.3: 48.88,31.5 48.88,31.62 50.5,33.25 50.5,34.5 52.5,36.5 52.5,37 51.88,37.62 49.75,37.62 49.5,37.38 47.38,37.38 R27.1 46.38,38.38 42.88,38.38 EC200_GSM.7 | 48.88,31.5 C19.2 | v47,47.75 51K.2 | v16.12,32.62 v16.12,39 | v48.5,31.5 48.88,31.5
  Bottom 0.3: v47,47.75 45.25,47.75 45,47.5 16.75,47.5 15.25,46 14.88,46 14.62,45.75 14.62,39 v16.12,39 | v16.12,32.62 18.12,30.62 21,30.62 21.56,30.06 | 21.56,30.06 22.25,29.38 U5.2 | 21.56,30.06 23.25,31.75 27.38,31.75 31.88,36.25 34.45,36.25 34.45,33.25 arc45 34.27,32.8 34.27,32.79 34.27,32.43 34.27,30.58 arc45 34.37,30.32 34.57,30.12 34.79,30.12 arc45 35.41,30.38 35.78,30.76 arc-45 37.58,31.5 v48.5,31.5

## Text on the board
tOrigins: /Users/augustinemwendwa/Downloads/Logo-Files-01 (2) (1) (1).bmp | /Users/augustinemwendwa/Downloads/Logo-Files-01 (2) (1).bmp
tNames: DHT22 | 2.8V | 1.8V | PMS5003 | + | -